# Altium PCB relay.pcbdoc
Units mil, origin at the board's own origin, x right, y up, seen from the top; angles counter-clockwise.
Board outline 5612.03 x 4597.02 mil, 2 copper layers (Top Layer, Bottom Layer); 92 components, 68 nets, 275 pads, 44 vias.
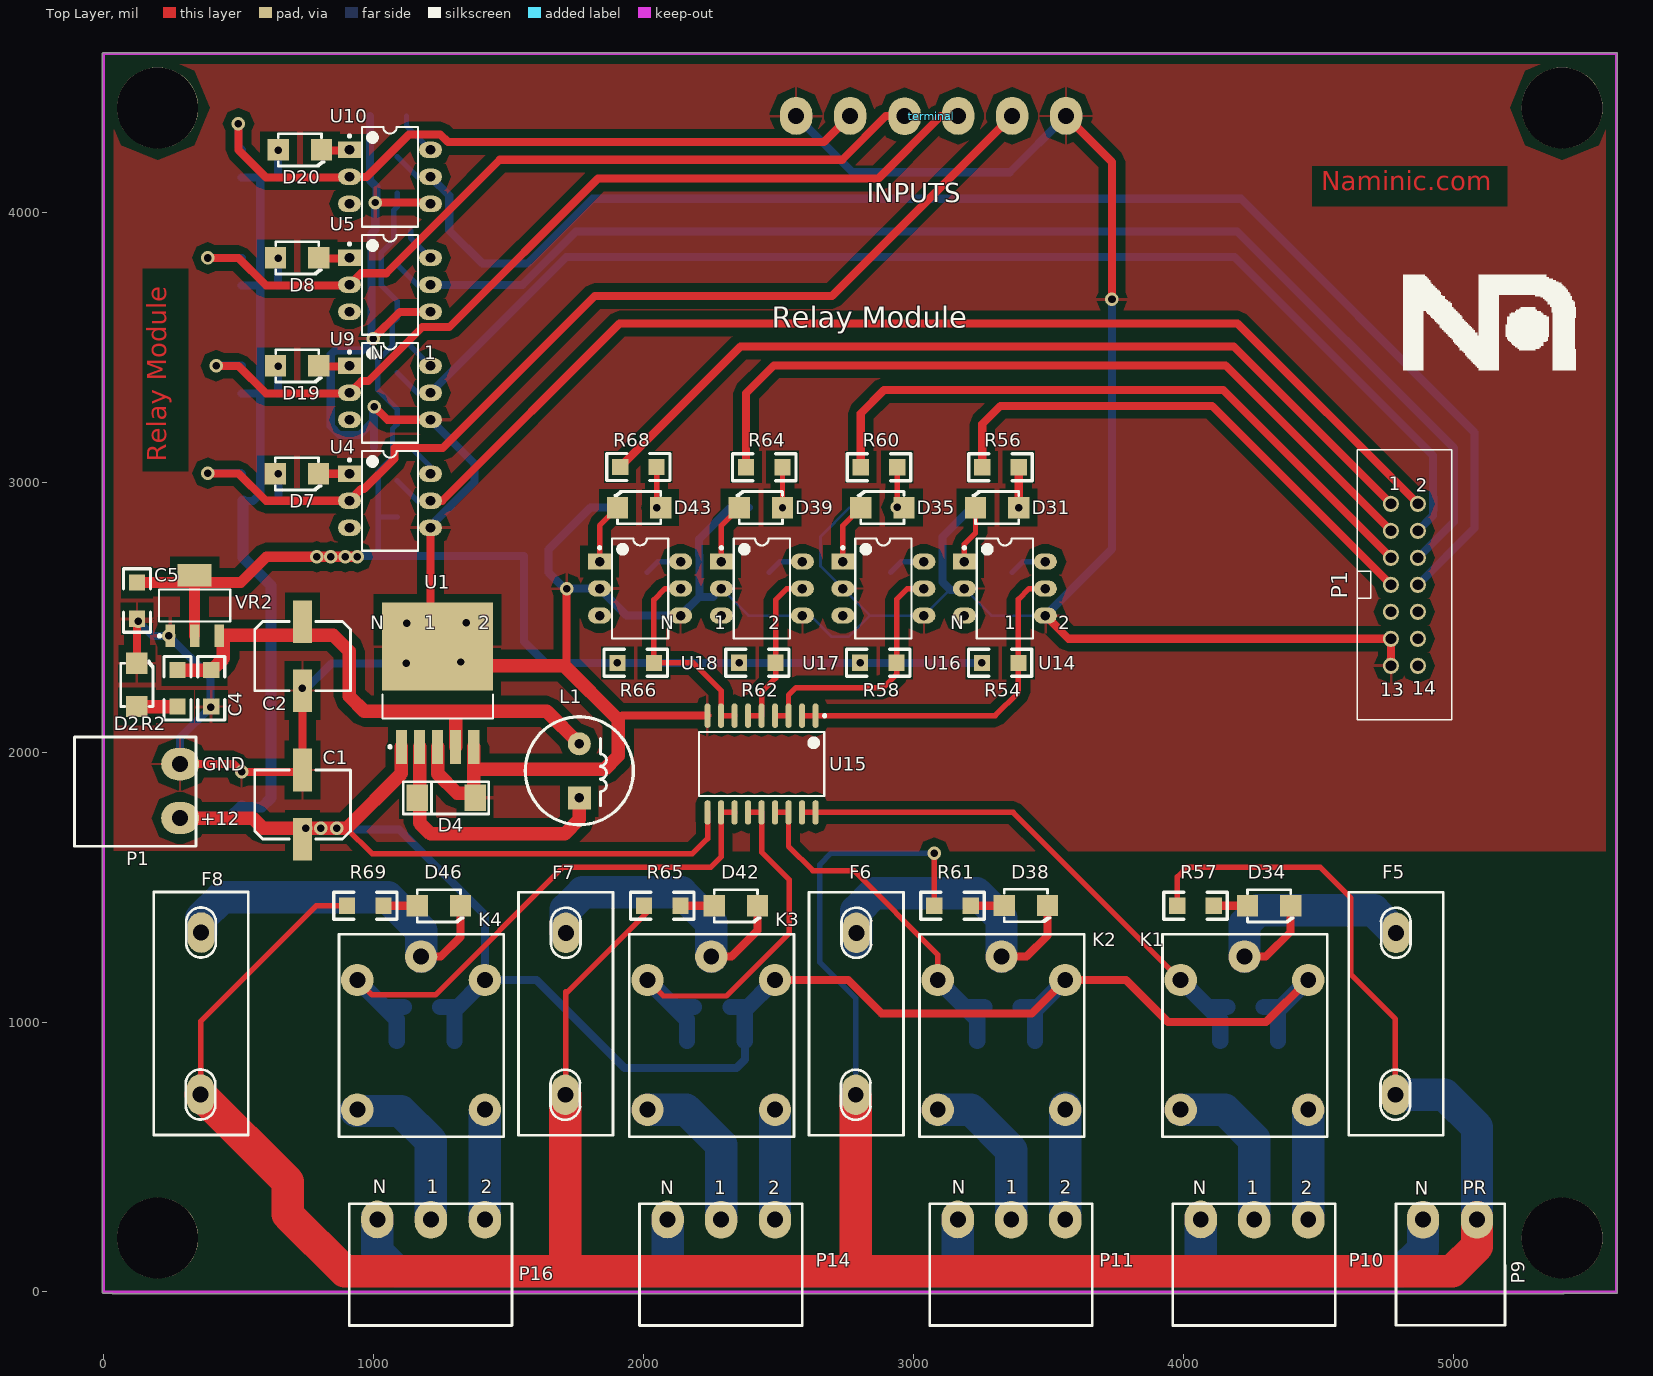
[diagram p0: Top Layer view]
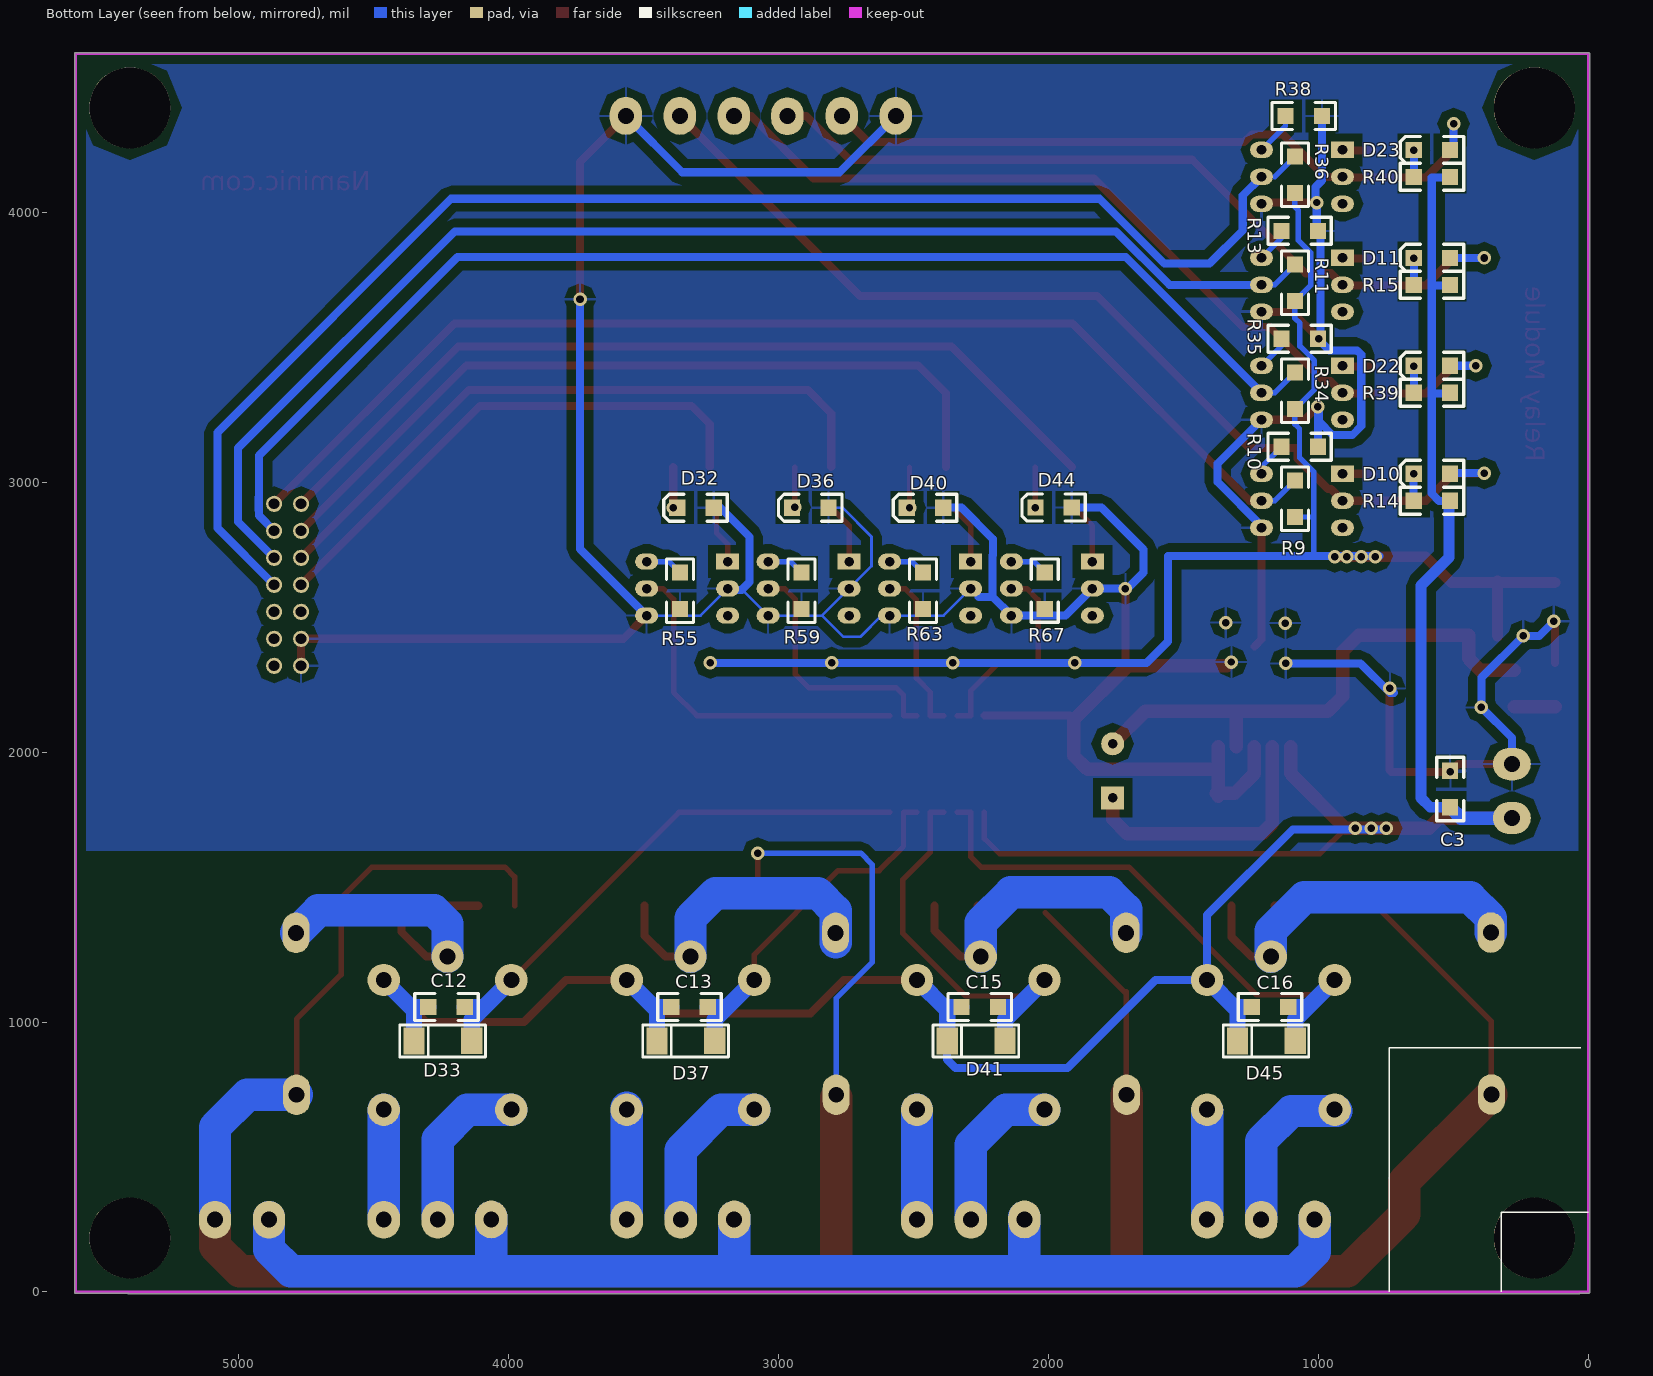
[diagram p1: Bottom Layer view, seen from below]

## Layer stack, top to bottom
Top Layer: signal copper 1.4
Dielectric: dielectric 12.6, FR-4, Dk 4.8
Bottom Layer: signal copper 1.4

## Board outline
-5.01,0 ccw(c0,0) 0,-5.02 32.29,-5.02 33.12,-5.85 ccw(c33.49,-5.49) 33.49,-6 5408.66,-6 ccw(c5408.66,-5.49) 5409.18,-5.49 ccw(c5408.66,-5.49) 5408.87,-5.02 5602,-5.02 ccw(c5602,0) 5607.01,0 5607.01,4586 ccw(c5602,4586) 5602,4591.01 0,4591.01 ccw(c0,4586) -5.01,4586

## Design rules (kind name [scope] priority, off if disabled: settings)
Clearance "Schematic Clearance Constraint_5" [InNet('NetK2_3')] p1: gap=60
Clearance "Schematic Clearance Constraint_3" [InNet('NetK3_2')] p2: gap=60
Clearance "Schematic Clearance Constraint_6" [InNet('NetK2_2')] p3: gap=60
Clearance "Schematic Clearance Constraint_8" [InNet('NetK1_2')] p4: gap=60
Clearance "Schematic Clearance Constraint_7" [InNet('NetK1_3')] p5: gap=60
Clearance "Schematic Clearance Constraint_2" [InNet('NetK3_3')] p6: gap=60
Clearance "Schematic Clearance Constraint_16" [InNet('NetK4_1')] p7: gap=60
Clearance "Schematic Clearance Constraint_4" [InNet('NetR53_1')] p8: gap=60
Clearance "Schematic Clearance Constraint_21" [InNet('PH')] p9: gap=60
Clearance "Schematic Clearance Constraint_1" [InNet('NetK4_2')] p10: gap=60
Clearance "Schematic Clearance Constraint" [InNet('NetK4_3')] p11: gap=60
Clearance "Schematic Clearance Constraint_12" [InNet('NetR4_2')] p12: gap=60
Clearance "Schematic Clearance Constraint_11" [InNet('NetR17_2')] p13: gap=60
Clearance "Schematic Clearance Constraint_17" [InNet('NetR37_1')] p14: gap=60
Clearance "Schematic Clearance Constraint_19" [InNet('NetR8_1')] p15: gap=60
Clearance "Schematic Clearance Constraint_18" [InNet('NetR21_1')] p16: gap=60
Clearance "Schematic Clearance Constraint_13" [InNet('NetK3_1')] p17: gap=60
Clearance "Schematic Clearance Constraint_9" [InNet('NetR43_2')] p18: gap=60
Clearance "Schematic Clearance Constraint_14" [InNet('NetK2_1')] p19: gap=60
Clearance "Schematic Clearance Constraint_10" [InNet('NetR30_2')] p20: gap=60
Clearance "Schematic Clearance Constraint_15" [InNet('NetK1_1')] p21: gap=60
Clearance PG [(InPoly)] p22: gap=30
Clearance [All] p23: gap=12
ComponentClearance [All] p1 off: gap=10 collisioncheckmode=3 verticalgap=10 showdistances=FALSE
HoleSize [All] p1 off: absolutevalues=TRUE maxlimit=100 minlimit=1 maxpercent=80.000 minpercent=20.000
PolygonConnect [All] p1: connectstyle=Relief reliefconductorwidth=10 reliefentries=4 polygonreliefangle="90 Angle"
RoutingLayers [All] p1: top layer_v5=FALSE bottom layer_v5=FALSE
RoutingVias [All] p1: holewidth=28 width=50 viastyle="Through Hole" minholewidth=28 minwidth=50 maxholewidth=28 maxwidth=50
SilkscreenOverComponentPads SilkToSolderMaskClearance [IsPad] p1: minsilkscreentomaskgap=10
SolderMaskExpansion [All] p1: expansion=4
Width [All] p1: maxlimit=120 minlimit=10 preferedwidth=30
24 further rules are at their usual default settings.

## Components (designator, comment, footprint, x,y, rotation, side; value= is the part's Value field where it differs from the comment)
C1 "470uF" CAP470 736.66,1805.51 r270 top
C2 "470uF" CAP470 736.66,2355.51 r90 top
C3 "100nF" 1206 511.66,1930.51 r270 bottom
C4 "100nF" 1206 398.66,2168.51 r90 top
C5 "100nF" 1206 123.66,2493.51 r90 top
C12 "100nF" 1206 4161.66,1055.51 r0 bottom
C13 "100nF" 1206 3261.66,1055.51 r0 bottom
C15 "100nF" 1206 2186.66,1055.51 r0 bottom
C16 "100nF" 1206 1111.66,1055.51 r0 bottom
D2 "LED RED" LED-1206 122.66,2168.51 r90 top
D4 "1N4007" 1N4007 1386.66,1830.51 r180 top
D7 "LED0" LED-1206 635.66,3030.51 r0 top
D8 "LED0" LED-1206 636.66,3830.51 r0 top
D10 "Diode 1N4148" Diode 511.66,3030.51 r0 bottom
D11 "Diode 1N4148" Diode 511.66,3830.51 r0 bottom
D19 "LED0" LED-1206 636.66,3430.51 r0 top
D20 "LED0" LED-1206 646.66,4230.51 r0 top
D22 "Diode 1N4148" Diode 511.66,3430.51 r0 bottom
D23 "Diode 1N4148" Diode 511.66,4230.51 r0 bottom
D31 "LED0" LED-1206 3389.18,2905.2 r180 top
D32 "Diode 1N4148" Diode 3239.18,2905.2 r0 bottom
D33 "Diode 1N4001" 1N4007 4124.62,930.02 r0 bottom
D34 "LED3" LED-1206 4236.66,1430.51 r0 top
D35 "LED0" LED-1206 2964.18,2905.2 r180 top
D36 "Diode 1N4148" Diode 2814.18,2905.2 r0 bottom
D37 "Diode 1N4001" 1N4007 3224.62,930.02 r0 bottom
D38 "LED3" LED-1206 3335.66,1431.51 r0 top
D39 "LED0" LED-1206 2514.18,2905.2 r180 top
D40 "Diode 1N4148" Diode 2389.18,2905.2 r0 bottom
D41 "Diode 1N4001" 1N4007 2149.62,930.02 r0 bottom
D42 "LED3" LED-1206 2261.66,1430.51 r0 top
D43 "LED0" LED-1206 2062.92,2905.35 r180 top
D44 "Diode 1N4148" Diode 1912.92,2905.35 r0 bottom
D45 "Diode 1N4001" 1N4007 1074.62,930.02 r0 bottom
D46 "LED3" LED-1206 1161.66,1430.51 r0 top
F5 "Fuse 1" FUSEXX 4786.66,1330.51 r270 top
F6 "Fuse 1" FUSEXX 2787.66,1330.51 r270 top
F7 "Fuse 1" FUSEXX 1711.66,1330.51 r270 top
F8 "Fuse 1" FUSEXX 360.66,1331.51 r270 top
K1 "Relay" RELEY 4461.66,1155.51 r270 top
K2 "Relay" RELEY 3561.66,1155.51 r270 top
K3 "Relay" RELEY 2486.66,1155.51 r270 top
K4 "Relay" RELEY 1411.66,1155.51 r270 top
L1 "100uH" L-.2/.4 1761.66,1830.51 r270 top
P1 "Header 2" POWER2_NEW 282.92,1955.51 r270 top
P1 "Header 7X2" IDC14S 4767.66,2919.51 r0 top (schematic designator P?)
P9 "Header 2" POWER2_NEW 4886.66,267.72 r0 top
P10 "Header 3" POWER3_NEW 4461.66,267.72 r180 top
P11 "Header 3" POWER3_NEW 3561.66,267.72 r180 top
P14 "Header 3" POWER3_NEW 2486.66,267.72 r180 top
P16 "Header 3" POWER3_NEW 1411.66,267.72 r180 top
R2 "180R" 1206 273.66,2303.51 r270 top
R9 "10K" 1206 1086.66,3005.51 r270 bottom
R10 "100K" 1206 1136.66,3130.51 r180 bottom
R11 "10K" 1206 1086.66,3805.51 r270 bottom
R13 "100K" 1206 1136.66,3930.51 r180 bottom
R14 "330" 1206 511.66,2930.51 r0 bottom
R15 "330" 1206 511.66,3730.51 r0 bottom
R34 "10K" 1206 1086.66,3405.51 r270 bottom
R35 "100K" 1206 1136.66,3530.51 r180 bottom
R36 "10K" 1206 1086.66,4205.51 r270 bottom
R38 "100K" 1206 1121.66,4355.51 r180 bottom
R39 "330" 1206 511.66,3330.51 r0 bottom
R40 "330" 1206 511.66,4130.51 r0 bottom
R54 "10K" 1206 3387.92,2330.35 r180 top
R55 "100K" 1206 3364.18,2665.2 r270 bottom
R56 "330" 1206 3254.18,3055.2 r0 top
R57 "100K" 1206 4111.66,1430.51 r180 top
R58 "10K" 1206 2936.66,2330.51 r180 top
R59 "100K" 1206 2914.18,2665.2 r270 bottom
R60 "330" 1206 2804.18,3055.2 r0 top
R61 "100K" 1206 3211.66,1430.51 r180 top
R62 "10K" 1206 2488.66,2330.51 r180 top
R63 "100K" 1206 2464.18,2665.2 r270 bottom
R64 "330" 1206 2379.18,3055.2 r0 top
R65 "100K" 1206 2136.66,1430.51 r180 top
R66 "10K" 1206 2037.92,2330.35 r180 top
R67 "100K" 1206 2012.92,2665.35 r270 bottom
R68 "330" 1206 1912.92,3055.35 r0 top
R69 "100K" 1206 1036.66,1430.51 r180 top
terminal "senseor" terminal6 2967.66,4355.51 r270 top
U1 "LM2576S-5.0" TS5B_N 1236.66,2255.51 r90 top
U4 "4N29" Opto 1061.66,2930.51 r0 top
U5 "4N29" Opto 1061.66,3730.51 r0 top
U9 "4N29" Opto 1061.66,3330.51 r0 top
U10 "4N29" Opto 1061.66,4130.51 r0 top
U14 "4N29" Opto 3339.18,2605.2 r0 top
U15 "ULN2803LW" LW18_N 2436.66,1955.51 r270 top
U16 "4N29" Opto 2889.18,2605.2 r0 top
U17 "4N29" Opto 2439.18,2605.2 r0 top
U18 "4N29" Opto 1987.92,2605.35 r0 top
VR2 "ASM1117 3.3V" Regolator 336.66,2555.51 r90 top

## Footprints (in the part's own frame and the unit in brackets; to place one, negate y for a bottom-side part, rotate by r counter-clockwise, add the part's x,y. Pads: shape width x height; smd on the part's side, far side on the other; paste and mask are expansions set on the pad)
1N4007 [mm]
  rect 2x2.5 smd: 1(0.277,-0.005) 2(5.718,0.01)
  silkscreen extent -1.01,-1.5 7.05,1.52
1206 [mil]
  rect 60x60 smd: 1(0,0) 2(135,0)
  silkscreen extent -50,-50 185,50
CAP470 [mm]
  rect 4x1.8 smd: 1(3.25,0) 2(-3.25,0)
  silkscreen extent -3.25,-4.5 3.25,4.5
Diode [mil]
  rect 60x60 smd: 1(0,0) 2(135,0)
  silkscreen extent -50,-50 185,50
FUSEXX [mm]
  oval 3.81x2.54 hole 1.5: 1(0,0) 2(15.24,-0.051)
  silkscreen extent -3.81,-4.44 19.05,4.45
IDC14S [mil]
  round 60 hole 40: 1(0,0) 2(100,0) 3(0,-100) 4(100,-100) 5(0,-200) 6(100,-200) 7(0,-300) 8(100,-300) 9(0,-400) 10(100,-400) 11(0,-500) 12(100,-500) 13(0,-600) 14(100,-600)
  silkscreen extent -125,-800 225,200
L-.2/.4 [mil]
  rect 85x85 hole 35.43: 1(0,0)
  round 85 hole 35.43: 2(-200,0)
  silkscreen extent -300,-200 100,200
LED-1206 [mm]
  rect 2x2 smd: 1(0,0) 2(4.064,0)
  silkscreen extent 0,-1.52 4.32,1.52
LW18_N [mm]
  oval 2.3x0.6 smd: 1(-4.55,5.08) 2(-4.55,3.81) 3(-4.55,2.54) 4(-4.55,1.27) 5(-4.55,0) 6(-4.55,-1.27) 7(-4.55,-2.54) 8(-4.55,-3.81) 9(-4.55,-5.08) 10(4.55,-5.08) 11(4.55,-3.81) 12(4.55,-2.54) 13(4.55,-1.27) 14(4.55,0) 15(4.55,1.27) 16(4.55,2.54) 17(4.55,3.81) 18(4.55,5.08)
  silkscreen extent -4.67,-5.9 3,6.06
Opto [mil]
  rect 85x60 hole 35.43: 1(-151.26,100.16)
  oval 85x60 hole 35.43: 2(-151.26,-99.84) 3(-151.26,0.16) 4(148.74,-99.84) 5(148.74,0.16) 6(148.74,100.16)
  silkscreen extent -156,-185 103,185
POWER2_NEW [mil]
  oval 120x140 hole 59.06: 1(200,0) 2(0,0)
  silkscreen extent -100,-391 304,59
POWER3_NEW [mil]
  oval 120x140 hole 59.06: 1(398.15,-0.94) 2(200,0) 3(0,0)
  silkscreen extent -100,-59 502,392
Regolator [mm]
  rect 2.1x0.9 smd: 1(-3.18,2.3) 3(-3.18,-2.3) 4(-3.18,0)
  rect 2.1x3.2 smd: 4(2.52,0)
  silkscreen extent -3.31,-3.35 1.17,3.42
RELEY [mil]
  round 120 hole 59.06: 1(-86.61,-236.22) 2(480.31,-472.44) 3(480.31,0) 4(0,0) 5(0,-472.44)
  silkscreen extent -170,-540 580,70
terminal6 [mil]
  oval 140x120 hole 59.06: 1(-0.74,597) 2(-0.74,397) 3(-0.74,197) 4(0.2,-1.15) 5(-0.74,-203) 6(-0.74,-403)
TS5B_N [mm]
  rect 3.2x1.05 smd: 1(-6,3.4) 2(-6,1.7) 3(-6,0) 4(-6,-1.7) 5(-6,-3.4)
  rect 8.3x10.45 smd: 6(3.45,0)
  silkscreen extent -6.12,-5.2 -1.1,5.2

## Part data
C1 C2: library part "Cap Pol1", "Polarized Capacitor (Radial)"
C3 C4 C5 C12 C13 C15 C16: library part "Cap Semi", "Capacitor (Semiconductor SIM Model)"
D2: library part LED0, "Typical INFRARED GaAs LED"
D4: library part "Diode 1N4007", "1 Amp General Purpose Rectifier"
D7 D8 D19 D20 D31 D35 D39 D43: "Typical INFRARED GaAs LED"
D10 D11 D22 D23 D32 D36 D40 D44: "High Conductance Fast Diode"
D33 D37 D41 D45: "1 Amp General Purpose Rectifier"
D34 D38 D42 D46: "Typical BLUE SiC LED"
F5 F6 F7 F8: "Fuse"
K1 K2 K3 K4: "SPDT Relay"
L1: library part INDUCTOR
P1 P9: "Header, 2-Pin"
P1: "Header, 7-Pin, Dual row"
P10 P11 P14 P16: "Header, 3-Pin"
R2 R9 R10 R11 R13 R14 R15 R34 R35 R36 R38 R39 R40 R54 R55 R56 R57 R58 R59 R60 R61 R62 R63 R64 R65 R66 R67 R68 R69: library part Res3, "Resistor"
terminal: library part "Header 6", "Header, 6-Pin"
U1: "SIMPLE SWITCHER; 3A Step-Down Voltage Regulator"
U4 U5 U9 U10 U14 U16 U17 U18: "5 Pin Mini Flat Pack Optocoupler"
U15: "High-Voltage, High-Current Darlington Array"
VR2: library part "Volt Reg_1", "Voltage Regulator"

## Free pads (board coordinates)
  round 60 hole 30: 0(4767.66,2319.51)
  round 300 hole 300: 1(200,200) 2(200,4386) 3(5402,4386) 4(5402,200)

## Via types
v1: diameter 50, hole 27.56, Top Layer to Bottom Layer, 26 vias
v2: diameter 50, hole 28, Top Layer to Bottom Layer, 18 vias

## Nets (pads, with @x,y where several pads share a name; then routed paths per layer and width w, separated by ;. In a path a pad name is that pad's centre, name@x,y a point inside that pad or via, vN(x,y) a via of type N, cw(c..) or ccw(c..) an arc to the next point about the centre after c; other vN are vias at no path point)
+3.3: C5.2 R9.2 R11.2 R34.2 R36.2 R54.2 R58.2 R62.2 R66.2 VR2.4 | length 5434.3
  Top Layer w40: C5.2 507.66,2628.51 602.66,2723.51 v1(939.66,2723.51) ; VR2.4@336.66,2430.31 VR2.4@336.66,2633.51
  Bottom Layer w20: 1016.66,2728.51 1016.66,3037.51 1069.66,3090.51 1069.66,3197.51 1086.66,3214.51 R34.2 1014.66,3342.51 1014.66,3449.51 1068.66,3503.51 1068.66,3588.51 1086.66,3606.51 R11.2 1028.66,3728.51 1028.66,3850.51 1073.66,3895.51 1073.66,4006.51 1086.66,4019.51 R36.2 ; 1017.66,2870.51 R9.2
  Bottom Layer w30: v1@773.66,2725.51 1556.66,2725.51 1556.66,2409.51 1635.82,2330.35 v1(3252.92,2330.35)
  other v1: 1902.92,2330.35 2353.66,2330.51 2801.66,2330.51 788.66,2723.51 841.66,2723.51 894.66,2723.51
+5: C2.1 C4.2 L1.2 R2.1 U1.4 VR2.3 | length 1984.3
  Top Layer w50: R2.1 400.66,2303.51 443.66,2346.51 443.66,2432.51 850.66,2432.51 909.66,2373.51 909.66,2206.51 965.66,2150.51 1641.66,2150.51 L1.2 ; U1.4 1303.59,2147.44
+12: C1.1 C3.2 C12.2 C13.2 C15.2 C16.2 D33.2 D37.2 D41.2 D45.2 K1.4 K2.4 K3.4 K4.4 P1.1@282.92,1755.51 R14.1 R15.1 R39.1 R40.1 U1.1 U15.10 | length 11262.6
  Top Layer w20: 899.66,1717.51 993.66,1623.51 2180.66,1623.51 2236.66,1679.51 U15.10
  Top Layer w30: C1.1@741.66,1717.51 C1.1@745.66,1713.51 ; K3.4 2757.66,1155.51 2881.66,1031.51 3437.66,1031.51 K2.4 3786.66,1155.51 3942.66,999.51 4305.66,999.51 K1.4
  Top Layer w50: P1.1@282.92,1755.51 551.66,1755.51 589.66,1717.51 899.66,1717.51 1102.8,1920.65 U1.1
  Bottom Layer w30: R39.1@510.72,3328.66 579.72,3328.66 ; R15.1@510.72,3728.66 579.72,3728.66 ; R40.1@510.72,4128.66 579.72,4128.66 579.72,3728.66 ; R14.1 515.66,2930.51 552.66,2930.51 580.66,2958.51 ; 579.72,2959.46 579.72,3328.66 ; v1@745.66,1713.51 1094.66,1713.51 1411.66,1396.51 K4.4 1603.66,1155.51 1929.66,829.51 2343.66,829.51 2374.72,860.57 D41.2 ; 579.72,3328.66 579.72,3728.66
  Bottom Layer w40: C3.2 585.66,1795.51 619.66,1829.51 619.66,2616.51 515.66,2720.51 R14.1@515.66,2930.51
  Bottom Layer w50: P1.1@282.92,1755.51 471.66,1755.51 C3.2
  Bottom Layer w60: C16.2 1311.66,1055.51 ; D45.2 1299.72,1043.57 K4.4 ; C15.2 2386.66,1055.51 ; D41.2 2374.72,1043.57 K3.4 ; C13.2 3461.66,1055.51 ; D37.2 3449.72,1043.57 K2.4 ; C12.2 4361.66,1055.51 ; D33.2 4349.72,1043.57 K1.4
  other v1: 747.66,1717.51 804.66,1717.51 863.66,1717.51
GND: C1.2 C2.2 C3.1 C4.1 C5.1 D2.2 D4.1 D32.1 D36.1 D40.1 D44.1 P1.2@282.92,1955.51 P1.11 P1.13 pad.0 R10.2 R13.2 R35.2 R38.2 R55.2 R59.2 R63.2 R67.2 terminal.1 terminal.6 U1.3 U1.5 U1.6 U4.4 U5.4 U9.4 U10.4 U14.3 U14.4 U15.9 U16.3 U16.4 U17.3 U17.4 U18.3 U18.4 VR2.1 | length 16454.6
  Top Layer w30: D2.2@123.66,2329.51 C5.1 ; P1.2@282.92,1955.51 481.66,1955.51 v2(510.66,1926.51) 729.71,1926.51 C1.2 C2.2 ; v2(997.66,3531.51) 1096.82,3630.67 U5.4 ; v1(1001.66,3279.51) 1050.51,3230.67 v2(1210.4,3230.67) ; v1(1005.66,4035.51) U10.4@1205.56,4035.51 ; v2(1210.4,2830.67) 1210.4,2417.6 U1.6 ; 1714.66,2330.51 v2(1714.66,2605.51) ; 1905.66,2119.51 1920.8,2134.65 U15.9 ; U14.4 3573.76,2419.51 P1.11 P1.13 ; terminal.1 3734.66,4186.25 v2(3734.66,3677.51)
  Top Layer w50: U1.3 1236.66,1920.51 1309.66,1847.51 D4.1@1378.66,1847.51 ; U1.6@1339.66,2320.51 1704.66,2320.51 1905.66,2119.51 1905.66,1986.51 1854.66,1935.51 1370.52,1935.51 ; D4.1@1370.52,1835.95 U1.5
  Bottom Layer w10: U17.3 2387.92,2505.35 U17.4 2617.82,2505.35 2696.66,2426.51 2759.08,2426.51 2837.92,2505.35 ; D36.1 2762.35,2905.2 2654.66,2797.51 2654.66,2688.61 U16.3 2837.92,2505.35 ; U14.4 3287.92,2505.35 U14.3 3137.92,2605.35 U16.4 2837.92,2505.35
  Bottom Layer w20: U10.4 U10.4@1227.82,4030.67
  Bottom Layer w30: v2(127.66,2484.51) 181.66,2430.51 v2(240.66,2430.51) 395.66,2275.51 v2(395.66,2165.51) 282.92,2052.77 P1.2@282.92,1955.51 ; v2@719.66,2219.51 734.66,2219.51 843.66,2328.51 v1(1120.66,2328.51) ; R38.2 986.66,4116.87 1010.02,4093.51 1010.02,4039.87 v1(1005.66,4035.51) 1005.66,3934.51 R13.2 991.66,3920.51 R35.2@991.66,3540.51 ; v1@998.02,3275.87 998.02,3225.17 946.51,3173.67 874.29,3173.67 840.9,3207.06 840.9,3471.85 856.72,3487.67 958.82,3487.67 R35.2 ; R10.2 v1@1001.66,3272.22 ; v2(1210.4,2830.67) 1210.4,2837.56 1372.66,2999.82 1372.66,3068.41 v2(1210.4,3230.67) U9.4@1228.92,3230.67 ; D44.1 1802.5,2905.35 1647.66,2750.51 1647.66,2664.51 1706.66,2605.51 v2(1714.66,2605.51) U18.3 1936.66,2505.51 U18.4 2206.16,2575.01 ; 2257.58,2575.01 2206.16,2575.01 ; D40.1 2321.35,2905.2 2205.66,2789.51 2205.66,2729.62 2206.16,2729.12 2206.16,2575.01 ; terminal.6 2773.4,4147.51 3355.92,4147.51 terminal.1 ; U14.3 3183.18,2600.61 3135.77,2600.61 3134.48,2601.91 3106.66,2629.72 3106.66,2680.22 3107.42,2680.98 3107.42,2797.27 3215.35,2905.2 D32.1 ; U14.4 3734.66,2752.09 v2(3734.66,3677.51) v2@3734.66,3683.51
  other v1: 1321.66,2333.51 1121.66,2477.51 1342.66,2479.51
  other v2: 734.66,2235.51
IN1: D10.1 terminal.2 U4.3 | length 3761.8
  Top Layer w30: v2(386,3033) 386.64,3032.36 499.81,3032.36 601.5,2930.67 U4.3 953.4,2973.67 964.09,2973.67 1076.66,3086.25 1076.66,3126.51 1255.66,3126.51 1818.66,3689.51 2697.92,3689.51 terminal.2
  Bottom Layer w30: v2(386,3033) 509.17,3033 D10.1
IN3: D22.1 terminal.3 U9.3 | length 3310.4
  Top Layer w30: v2(417,3431) 417.49,3430.51 498.87,3430.51 600.56,3328.82 909.46,3328.82 954.31,3373.67 979.9,3373.67 1179.9,3573.67 1279.9,3573.67 1831.23,4125 2869.24,4125 3100.49,4356.25 terminal.3
  Bottom Layer w30: v2(417,3431) 511.17,3431 D22.1
IN5: D11.1 terminal.4 U5.3 | length 3008.5
  Top Layer w30: v2(385,3830) 385.51,3830.51 498.87,3830.51 600.56,3728.82 U5.3@909.46,3728.82 ; U5.3 953.4,3773.67 1046.51,3773.67 1466.84,4194 2735.45,4194 2896.75,4355.31 terminal.4
  Bottom Layer w30: v2(385,3830) 511.15,3830 D11.1
IN7: D23.1 terminal.5 U10.3 | length 2622.2
  Top Layer w30: v2(499,4327) 498.87,4326.87 498.87,4230.51 600.56,4128.82 U10.3@909.46,4128.82 ; U10.3 973.63,4130.67 1130.63,4287.67 1246.51,4287.67 1274.93,4259.25 2667.66,4259.25 terminal.5
  Bottom Layer w30: v2(499,4327) 499,4243.17 D23.1
INPUT1: P1.2@4867.66,2919.51 R9.1 U4.5 | length 4360.8
  Top Layer w30: v2(1210.4,2930.67) 1253.82,2930.67 1910.66,3587.51 4199.66,3587.51 P1.2@4867.66,2919.51
  Bottom Layer w20: R9.1 1161.5,2930.67 v2(1210.4,2930.67)
INPUT3: P1.4 R34.1 U9.5 | length 4683.7
  Bottom Layer w20: R34.1 1161.51,3330.67 v2(1210.4,3330.67)
  Bottom Layer w30: v2(1210.4,3330.67) 1713.24,3833.51 4188.49,3833.51 4924.19,3097.81 4924.19,2943.59 4924.66,2943.12 4924.66,2895.9 4924.19,2895.43 4924.19,2876.04 P1.4
INPUT5: P1.6 R11.1 U5.5 | length 4821.4
  Bottom Layer w20: R11.1 1161.51,3730.67 v2(1210.4,3730.67)
  Bottom Layer w30: v2(1210.4,3730.67) 1551,3730.67 1748.85,3928.51 4198.49,3928.51 5001,3126 5001,2852.85 P1.6
INPUT7: P1.8 R36.1 U10.5 | length 5291.5
  Bottom Layer w20: R36.1 1161.51,4130.67
  Bottom Layer w30: v2(1210.4,4130.67) 1279.9,4061.17 1279.9,3932.27 1402.66,3809.51 1570.45,3809.51 1810.45,4049.51 4212.46,4049.51 5078,3183.97 5078,2829.85 P1.8
INPUTR1: R54.1 U14.5 U15.1 U15.2 | length 1298.3
  Top Layer w20: U15.2 3301.8,2134.65 3387.92,2220.77 3387.92,2565.77 3427.5,2605.35 U14.5
INPUTR2: R58.1 U15.3 U15.4 U16.5 | length 953.5
  Top Layer w20: U15.4 U15.3 2536.66,2210.51 2564.66,2238.51 2887.66,2238.51 2937.66,2288.51 2937.66,2566.51 2976.5,2605.35 U16.5
INPUTR3: R62.1 U15.5 U15.6 U17.5 | length 617
  Top Layer w20: U15.6 U15.5 2436.66,2221.51 2488.66,2273.51 R62.1 2488.66,2563.51 2530.5,2605.35 U17.5
INPUTR4: R66.1 U15.7 U15.8 U18.5 | length 783.7
  Top Layer w20: U18.5 2079.66,2605.51 2037.92,2563.77 R66.1 2183.82,2330.35 2286.66,2227.51 U15.8 U15.7
INRB1: P1.7 R56.1 | length 1975.9
  Top Layer w30: R56.1 3254.18,3215.03 3321.66,3282.51 4104.66,3282.51 P1.7
INRB2: P1.5 R60.1 | length 2455.4
  Top Layer w30: R60.1 2804.18,3254.03 2890.66,3340.51 4146.66,3340.51 P1.5
INRB3: P1.3 R64.1 | length 2959.1
  Top Layer w30: R64.1 2379.18,3329.03 2482.66,3432.51 4154.66,3432.51 P1.3
INRB4: P1.1@4767.66,2919.51 R68.1 | length 3280.6
  Top Layer w30: R68.1 2359.08,3501.51 4185.66,3501.51 P1.1@4767.66,2919.51
NetD2_1: D2.1 R2.2 | length 151
  Top Layer w50: D2.1 R2.2
NetD4_2: D4.2 L1.1 U1.2 | length 993.1
  Top Layer w50: U1.2 1169.73,1737.44 1210.66,1696.51 1707.66,1696.51 1761.66,1750.51 L1.1
NetD7_1: D7.1 D10.2 R14.2 | length 100
  Bottom Layer w30: R14.2 v1(646.66,3030.51)
NetD7_2: D7.2 U4.1 | length 114.6
  Top Layer w30: D7.2@795.82,3030.67 U4.1
NetD8_1: D8.1 D11.2 R15.2 | length 100
  Bottom Layer w30: R15.2@645.72,3728.66 v1(645.72,3828.66)
NetD8_2: D8.2 U5.1 | length 114.6
  Top Layer w30: D8.2@794.88,3828.82 U5.1@909.46,3828.82
NetD19_1: D19.1 D22.2 R39.2 | length 100
  Bottom Layer w30: R39.2@645.72,3328.66 v1(645.72,3428.66)
NetD19_2: D19.2 U9.1 | length 114.6
  Top Layer w30: D19.2@794.88,3428.82 U9.1@909.46,3428.82
NetD20_1: D20.1 D23.2 R40.2 | length 100
  Bottom Layer w30: R40.2@645.72,4128.66 v1(645.72,4228.66)
NetD20_2: D20.2 U10.1 | length 114.6
  Top Layer w30: D20.2@794.88,4228.82 U10.1@909.46,4228.82
NetD31_1: D31.1 D32.2 R56.2 | length 150
  Top Layer w30: v1(3389.18,2905.2) R56.2
NetD31_2: D31.2 U14.1 | length 216.9
  Top Layer w20: U14.1 3187.92,2769.77 3229.18,2811.03 D31.2
NetD34_1: D34.1 R57.1 | length 125
  Top Layer w30: R57.1 D34.1
NetD34_2: D34.2 F5.1 K1.1 | length 1043.1
  Top Layer w30: K1.1 4304.28,1242.13 4396.66,1334.51 D34.2
  Bottom Layer w120: K1.1 4225.44,1363.29 4275.66,1413.51 4703.66,1413.51 F5.1
NetD35_1: D35.1 D36.2 R60.2 | length 149.2
  Top Layer w20: v1(2939.18,2906.03) R60.2
NetD35_2: D35.2 U16.1 | length 227.3
  Top Layer w20: U16.1 2737.92,2838.94 D35.2
NetD38_1: D38.1 R61.1 | length 133
  Top Layer w30: R61.1 D38.1@3344.66,1430.51
NetD38_2: D38.2 F6.1 K2.1 | length 1177.4
  Top Layer w30: K2.1 3418.28,1242.13 3495.66,1319.51 D38.2
  Bottom Layer w120: F6.1@2787.66,1294.51 2787.66,1411.51 2853.66,1477.51 3232.66,1477.51 3325.44,1384.73 K2.1
NetD39_1: D39.1 D40.2 R64.2 | length 150
  Top Layer w20: v1(2514.18,2905.2) R64.2
NetD39_2: D39.2 U17.1 | length 227.3
  Top Layer w20: U17.1 2287.92,2838.94 D39.2
NetD42_1: D42.1 R65.1 | length 125
  Top Layer w30: R65.1 D42.1
NetD42_2: D42.2 F7.1 K3.1 | length 1127.9
  Top Layer w30: K3.1 2325.28,1242.13 2421.66,1338.51 D42.2
  Bottom Layer w120: F7.1 1711.66,1417.52 1774.66,1480.51 2138.66,1480.51 2250.44,1368.73 K3.1
NetD43_1: D43.1 D44.2 R68.2 | length 150
  Top Layer w20: v1(2047.92,2905.35) R68.2
NetD43_2: D43.2 U18.1 | length 227.3
  Top Layer w20: U18.1 1836.66,2839.09 D43.2
NetD46_1: D46.1 R69.1 | length 125
  Top Layer w30: R69.1 D46.1
NetD46_2: D46.2 F8.1 K4.1 | length 1338.8
  Top Layer w30: K4.1 1248.28,1242.13 1321.66,1315.51 D46.2
  Bottom Layer w120: F8.1 360.66,1384.51 437.66,1461.51 1052.66,1461.51 1175.44,1338.73 K4.1
NetK1_2: K1.2 P10.2 | length 606.6
  Bottom Layer w120: K1.2 4151.98,675.2 4261.66,565.51 P10.2@4261.66,276.77
NetK1_3: K1.3 P10.3 | length 398.4
  Bottom Layer w120: P10.3@4461.66,276.77 K1.3
NetK2_2: K2.2 P11.2 | length 583.2
  Bottom Layer w120: K2.2 3211.98,675.2 3361.66,525.51 P11.2@3361.66,276.77
NetK2_3: K2.3 P11.3 | length 406.7
  Bottom Layer w120: P11.3@3561.66,276.77 K2.3@3561.66,683.51
NetK3_2: K3.2 P14.2 | length 594.9
  Bottom Layer w120: K3.2 2156.98,675.2 2286.66,545.51 P14.2@2286.66,276.77
NetK3_3: K3.3 P14.3 | length 398.4
  Bottom Layer w120: P14.3@2486.66,276.77 K3.3
NetK4_2: K4.2 P16.2 | length 607.1
  Bottom Layer w120: K4.2@932.66,670.51 1099.66,670.51 1211.66,558.51 P16.2@1211.66,276.77
NetK4_3: K4.3 P16.3 | length 392.7
  Bottom Layer w120: P16.3@1411.66,276.77 K4.3@1411.66,669.51
NetR10_1: R10.1 U4.6 | length 130.4
  Bottom Layer w20: R10.1 1210.4,3056.77 U4.6
NetR13_1: R13.1 U5.6 | length 130.4
  Bottom Layer w20: R13.1 1136.66,3904.41 U5.6
NetR35_1: R35.1 U9.6 | length 130.4
  Bottom Layer w20: R35.1 1136.66,3504.41 U9.6
NetR38_1: R38.1 U10.6 | length 161.6
  Bottom Layer w20: R38.1 1121.66,4319.41 U10.6
NetR55_1: R55.1 U14.6 | length 140.4
  Bottom Layer w20: R55.1 3404.34,2705.35 U14.6
NetR59_1: R59.1 U16.6 | length 140.4
  Bottom Layer w20: R59.1 2954.34,2705.35 U16.6
NetR63_1: R63.1 U17.6 | length 140.4
  Bottom Layer w20: R63.1 2504.34,2705.35 U17.6
NetR67_1: R67.1 U18.6 | length 140.4
  Bottom Layer w20: R67.1 2053.08,2705.51 U18.6
NOUL: P9.2 P10.1 P11.1 P14.1 P16.1 | length 4782.6
  Bottom Layer w120: P16.1@1013.51,277.72 1013.51,148.66 1085.17,77 4806.15,77 4886.66,157.51 P9.2@4886.66,276.77 ; 2088.51,77.15 P14.1@2088.51,277.72 ; 3163.51,77 P11.1@3163.51,277.72 ; 4063.51,80.85 P10.1@4063.51,277.72
PHR: F5.2 F6.2 F7.2 F8.2 P9.1 R57.2 R61.2 R65.2 R69.2 | length 12113.2
  Top Layer w20: F8.2 358.66,1002.51 786.66,1430.51 R69.2 ; F7.2@1711.66,755.51 1711.66,1112.52 ; 1711.66,1105.51 R65.2@2011.66,1405.51 ; R61.2 v1(3076.66,1625.51) ; R57.2 3976.66,1537.51 4012.66,1573.51 4505.66,1573.51 4619.66,1459.51 4619.66,1175.51 4784.66,1010.51 F5.2
  Top Layer w120: F8.2 681.66,408.51 681.66,287.51 ; 685.18,283.99 892.17,77 4995.15,77 5086.66,168.51 P9.1@5086.66,276.77 ; 1709.66,82 F7.2 ; 2785.66,79 F6.2@2785.66,720.51
  Bottom Layer w20: F6.2 2785.66,1087.51 2652.66,1220.51 2652.66,1583.51 2694.66,1625.51 v1(3076.66,1625.51)
  Bottom Layer w120: F5.2 4966.66,730.51 5086.66,610.51 P9.1@5086.66,276.77
RELAY_IN1: C12.1 D33.1 K1.5 U15.17 U15.18 | length 2018.1
  Top Layer w20: U15.17 3368.36,1776.38 K1.5
  Bottom Layer w60: K1.5 4135.52,1009.21 D33.1 ; 4089.22,1055.51 C12.1
RELAY_IN2: C13.1 D37.1 K2.5 U15.15 U15.16 | length 1347.1
  Top Layer w20: U15.15 U15.16 2536.66,1650.51 2626.66,1560.51 2778.66,1560.51 3089.22,1249.95 K2.5
  Bottom Layer w60: K2.5 3235.52,1009.21 D37.1 ; 3189.22,1055.51 C13.1
RELAY_IN3: C15.1 D41.1 K3.5 U15.13 U15.14 | length 1544.2
  Top Layer w20: K3.5 2073.22,1096.51 2306.66,1096.51 2539.66,1329.51 2539.66,1526.51 2436.66,1629.51 U15.14 U15.13
  Bottom Layer w60: K3.5 2160.52,1009.21 D41.1 ; 2114.22,1055.51 C15.1
RELAY_IN4: C16.1 D45.1 K4.5 U15.11 U15.12 | length 2155.1
  Top Layer w20: K4.5 994.22,1100.51 1228.66,1100.51 1701.66,1573.51 2248.66,1573.51 2286.66,1611.51 U15.11 U15.12
  Bottom Layer w60: K4.5 1085.52,1009.21 D45.1 ; 1039.22,1055.51 C16.1
pads on no net: P1.9 P1.10 P1.12 P1.14 U4.2 U5.2 U9.2 U10.2 U14.2 U16.2 U17.2 U18.2
copper on no net: | length 5382.9
  Top Layer w1: 28,0 33.49,-5.49 5408.66,-5.49

## Polygon pours and split planes (outlines as drawn)
GND on Bottom Layer "Top Layer-No Net" (solid, pour order 6): 0,4586 5602,4586 5602,4518.41 5602,1648.79 5601,1647.73 5602,1646.67 5602,1634 5502,1634 5357,1634 1,1634 0,1635.06 0,4586
GND on Top Layer "Top Layer-No Net" (solid, pour order 8): 2165.96,1633 5588,1633 5590,1635.11 5589,1636.17 5589,4584.94 2,4584.94 1,4586 0,4584.94 0,4260.7 0,1635.11

## Keep-outs
Keep-Out Layer:
  lines w10: 0,0 0,4586 5602,4586 5602,0 0,0

## Other copper
Top Layer:
  text "Naminic.com" at 4510.66,4057.51 h120
  text "Relay Module" at 255.66,3074.51 h120 r90

## Silkscreen, mask and mechanical layers (free items; w line width, h text height)
Top Overlay:
  drawing of 248 lines, arcs and shapes, not listed
  text "INPUTS" at 2826,4013 h120
  text "Relay Module" at 2474.66,3571.51 h78.74
  text "N" at 986.66,3455.51 h50
  text "1" at 1186.66,3455.51 h50
  text "N" at 986.66,2455.51 h50
  text "1" at 1186.66,2455.51 h50
  text "2" at 1386.66,2455.51 h50
  text "N" at 2061.66,2455.51 h50
  text "1" at 2261.66,2455.51 h50
  text "2" at 2461.66,2455.51 h50
  text "N" at 3134.81,2454.57 h50
  text "1" at 3334.81,2454.57 h50
  text "2" at 3534.81,2454.57 h50
  text "GND" at 365.66,1931.51 h50
  text "+12" at 356.66,1729.51 h50
  text "N" at 995.66,365.51 h50
  text "1" at 1195.66,365.51 h50
  text "2" at 1395.66,365.51 h50
  text "N" at 3140.81,363.57 h50
  text "1" at 3340.81,363.57 h50
  text "2" at 3540.81,363.57 h50
  text "N" at 2061.66,362.51 h50
  text "1" at 2261.66,362.51 h50
  text "2" at 2461.66,362.51 h50
  text "N" at 4033.81,361.57 h50
  text "1" at 4233.81,361.57 h50
  text "2" at 4433.81,361.57 h50
  text "PR" at 5033.66,361.51 h50
  text "N" at 4856.66,360.51 h50
Bottom Overlay:
  lines w5: 0,295.28 323.28,295.28 323.28,0 ; 28,905.51 736.66,905.51 736.66,0

## Text inside footprints (layer, text, board x,y; h text height)
P1: Top Overlay "13" at 4728.66,2206.51 h50; Top Overlay "14" at 4847.66,2212.51 h50; Top Overlay "1" at 4759.66,2969.51 h50; Top Overlay "2" at 4860.66,2964.51 h50